# EAGLE board ring_mod_simple (EAGLE 5.10)
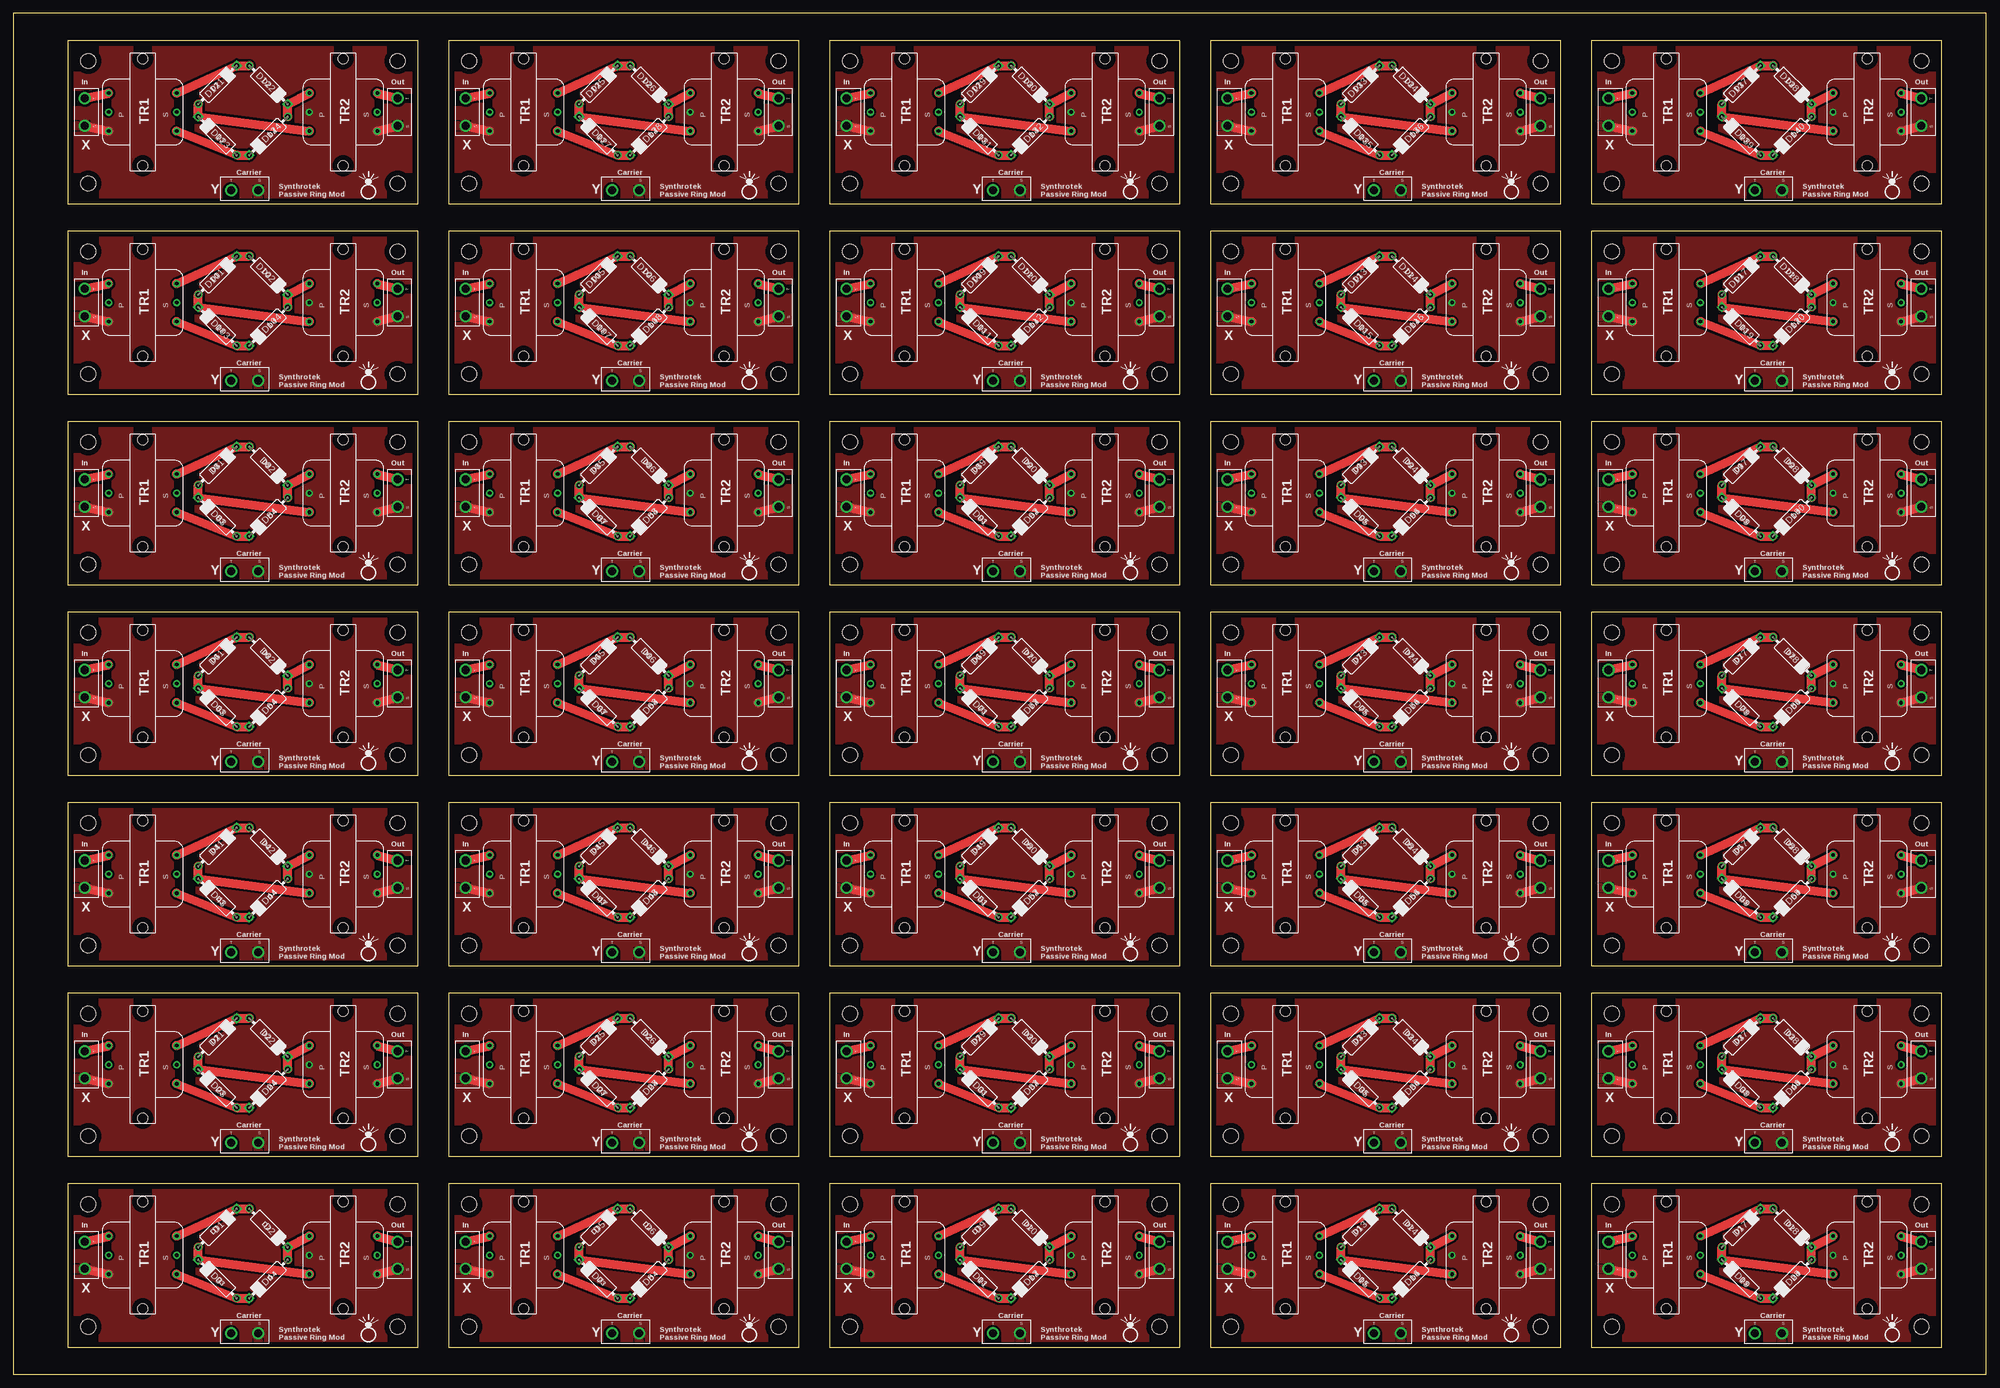
[diagram p0: board, top side]
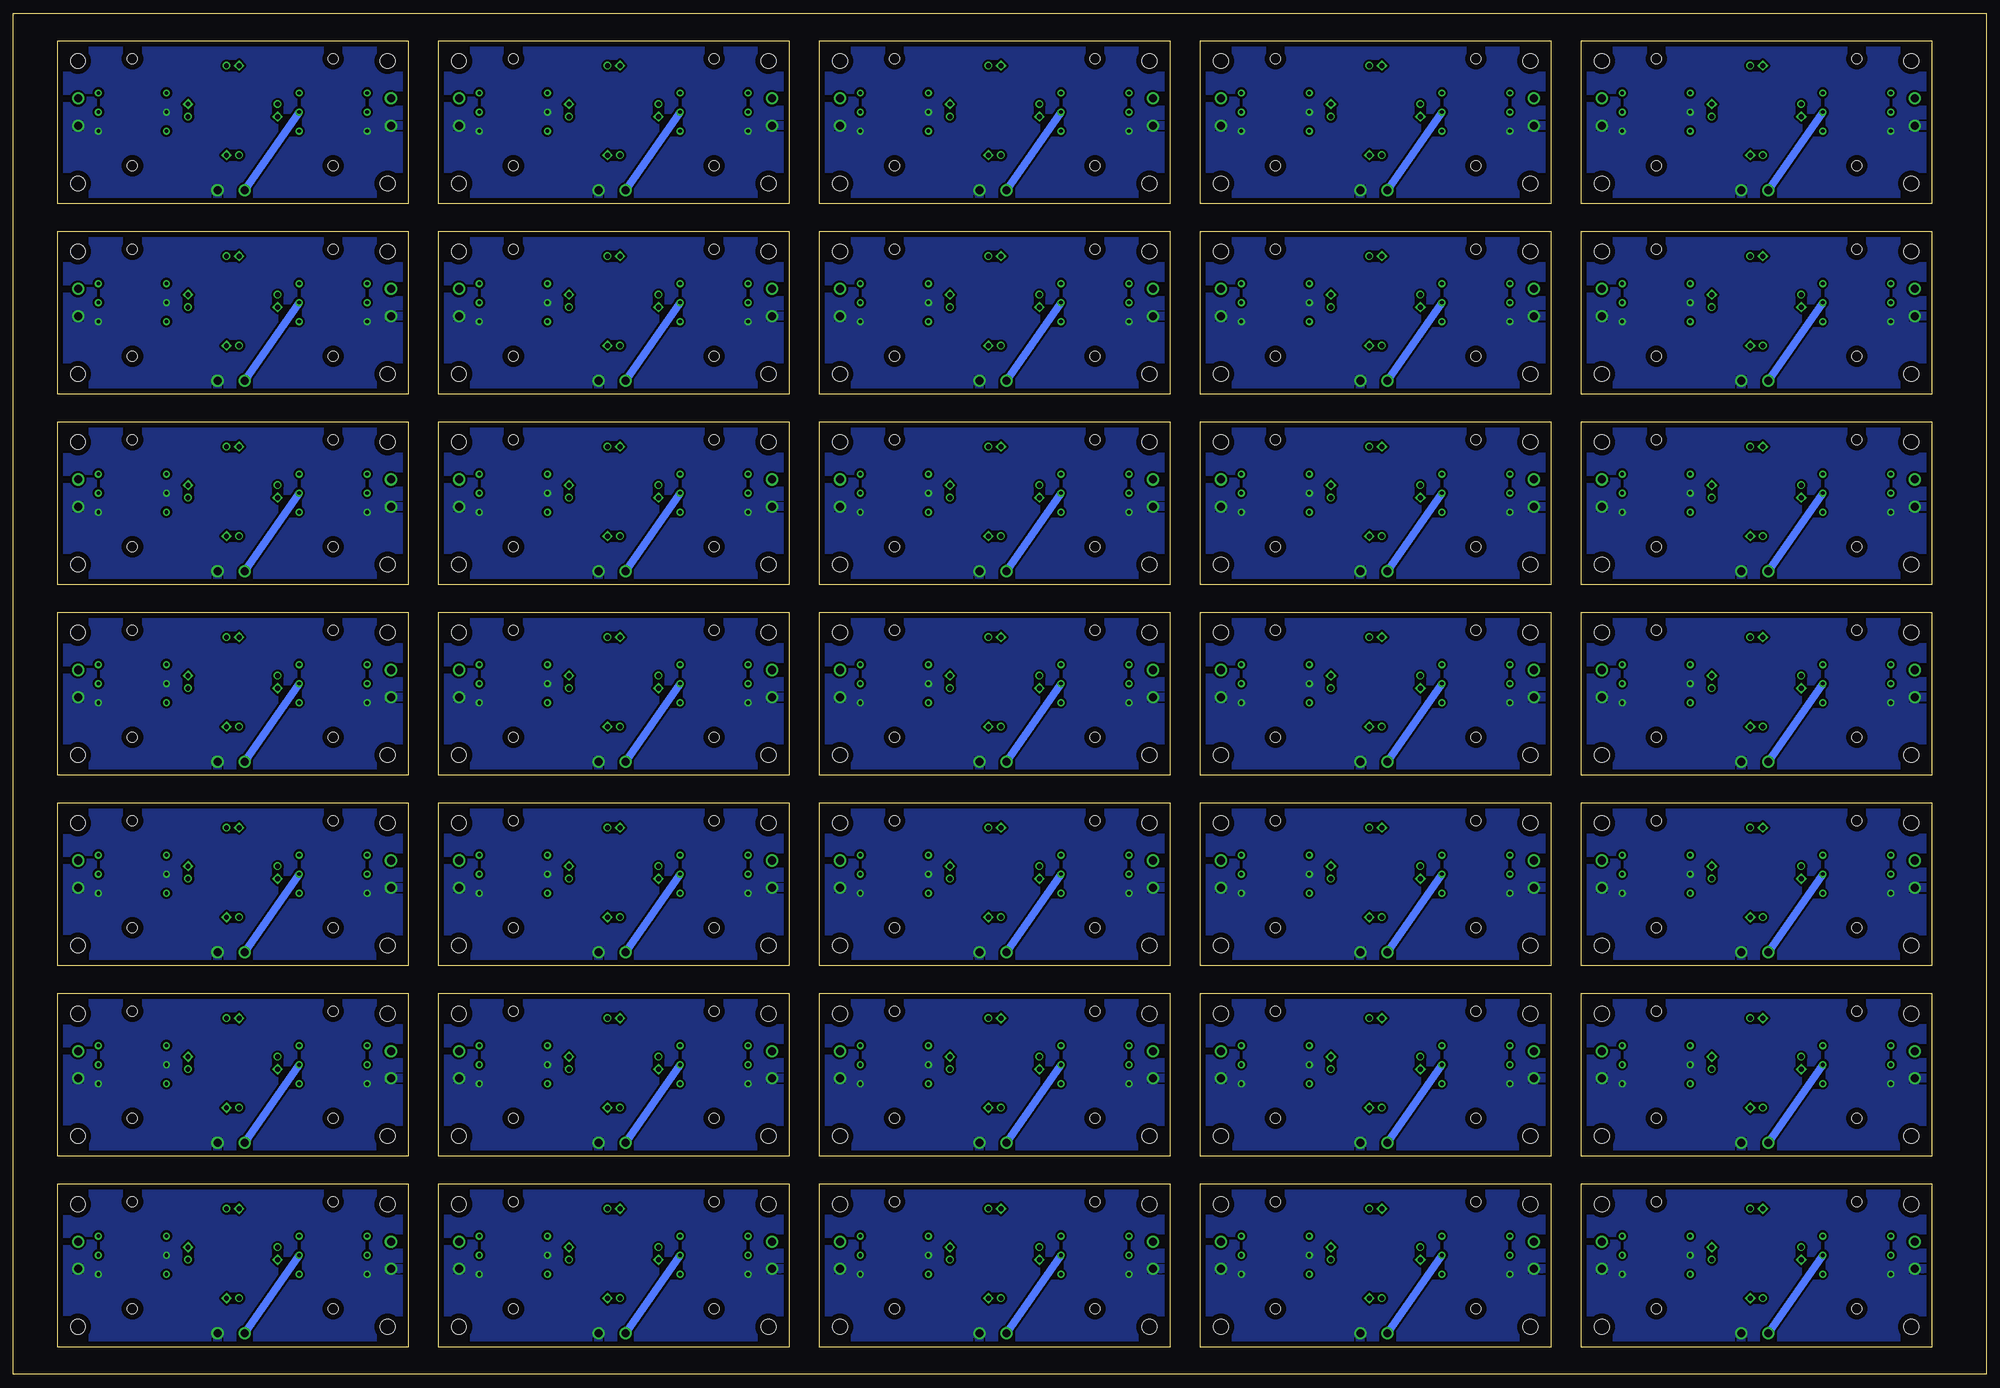
[diagram p1: board, bottom side, seen from below]

Size 368.3 x 254 mm. Coordinates in mm from the lower left corner, seen from the top.
Outline: 10.16,5.08 75.56,5.08 75.56,35.56 10.16,35.56 10.16,5.08
Outline: 81.28,5.08 146.69,5.08 146.69,35.56 81.28,35.56 81.28,5.08
Outline: 152.4,5.08 217.81,5.08 217.81,35.56 152.4,35.56 152.4,5.08
Outline: 223.52,5.08 288.93,5.08 288.93,35.56 223.52,35.56 223.52,5.08
Outline: 294.64,5.08 360.05,5.08 360.05,35.56 294.64,35.56 294.64,5.08
Outline: 10.16,40.64 75.56,40.64 75.56,71.12 10.16,71.12 10.16,40.64
Outline: 81.28,40.64 146.69,40.64 146.69,71.12 81.28,71.12 81.28,40.64
Outline: 152.4,40.64 217.81,40.64 217.81,71.12 152.4,71.12 152.4,40.64
Outline: 223.52,40.64 288.93,40.64 288.93,71.12 223.52,71.12 223.52,40.64
Outline: 294.64,40.64 360.05,40.64 360.05,71.12 294.64,71.12 294.64,40.64
Outline: 10.16,76.2 75.56,76.2 75.56,106.68 10.16,106.68 10.16,76.2
Outline: 81.28,76.2 146.69,76.2 146.69,106.68 81.28,106.68 81.28,76.2
Outline: 152.4,76.2 217.81,76.2 217.81,106.68 152.4,106.68 152.4,76.2
Outline: 223.52,76.2 288.93,76.2 288.93,106.68 223.52,106.68 223.52,76.2
Outline: 294.64,76.2 360.05,76.2 360.05,106.68 294.64,106.68 294.64,76.2
Outline: 10.16,111.76 75.56,111.76 75.56,142.24 10.16,142.24 10.16,111.76
Outline: 81.28,111.76 146.69,111.76 146.69,142.24 81.28,142.24 81.28,111.76
Outline: 152.4,111.76 217.81,111.76 217.81,142.24 152.4,142.24 152.4,111.76
Outline: 223.52,111.76 288.93,111.76 288.93,142.24 223.52,142.24 223.52,111.76
Outline: 294.64,111.76 360.05,111.76 360.05,142.24 294.64,142.24 294.64,111.76
Outline: 10.16,147.32 75.56,147.32 75.56,177.8 10.16,177.8 10.16,147.32
Outline: 81.28,147.32 146.69,147.32 146.69,177.8 81.28,177.8 81.28,147.32
Outline: 152.4,147.32 217.81,147.32 217.81,177.8 152.4,177.8 152.4,147.32
Outline: 223.52,147.32 288.93,147.32 288.93,177.8 223.52,177.8 223.52,147.32
Outline: 294.64,147.32 360.05,147.32 360.05,177.8 294.64,177.8 294.64,147.32
Outline: 10.16,182.88 75.56,182.88 75.56,213.36 10.16,213.36 10.16,182.88
Outline: 81.28,182.88 146.69,182.88 146.69,213.36 81.28,213.36 81.28,182.88
Outline: 152.4,182.88 217.81,182.88 217.81,213.36 152.4,213.36 152.4,182.88
Outline: 223.52,182.88 288.93,182.88 288.93,213.36 223.52,213.36 223.52,182.88
Outline: 294.64,182.88 360.05,182.88 360.05,213.36 294.64,213.36 294.64,182.88
Outline: 10.16,218.44 75.56,218.44 75.56,248.92 10.16,248.92 10.16,218.44
Outline: 81.28,218.44 146.69,218.44 146.69,248.92 81.28,248.92 81.28,218.44
Outline: 152.4,218.44 217.81,218.44 217.81,248.92 152.4,248.92 152.4,218.44
Outline: 223.52,218.44 288.93,218.44 288.93,248.92 223.52,248.92 223.52,218.44
Outline: 294.64,218.44 360.05,218.44 360.05,248.92 294.64,248.92 294.64,218.44
Copper layers (1*16): Top 0.035mm / dielectric 1.5mm / Bottom 0.035mm
Design rules "default": minimum track width 10mil, minimum drill 24mil, track to track 8mil, track to pad 8mil, pad to pad 8mil, via to via 8mil, smd to smd 8mil, copper to edge 40mil, drill to drill 8mil, minimum pad ring 10mil, minimum via ring 8mil, stop-mask expansion 4mil, vias tented up to drill 0mil, thermal gap 10mil
Holes 2.8 mm at 13.97,31.75 13.97,8.89 71.76,8.89 71.76,31.75 85.09,31.75 85.09,8.89 142.88,8.89 142.88,31.75 156.21,31.75 156.21,8.89 214,8.89 214,31.75 227.33,31.75 227.33,8.89 285.12,8.89 285.12,31.75 298.45,31.75 298.45,8.89 356.24,8.89 356.24,31.75 13.97,67.31 13.97,44.45 71.76,44.45 71.76,67.31 85.09,67.31 85.09,44.45 142.88,44.45 142.88,67.31 156.21,67.31 156.21,44.45 214,44.45 214,67.31 227.33,67.31 227.33,44.45 285.12,44.45 285.12,67.31 298.45,67.31 298.45,44.45 356.24,44.45 356.24,67.31 13.97,102.87 13.97,80.01 71.76,80.01 71.76,102.87 85.09,102.87 85.09,80.01 142.88,80.01 142.88,102.87 156.21,102.87 156.21,80.01 214,80.01 214,102.87 227.33,102.87 227.33,80.01 285.12,80.01 285.12,102.87 298.45,102.87 298.45,80.01 356.24,80.01 356.24,102.87 13.97,138.43 13.97,115.57 71.76,115.57 71.76,138.43 85.09,138.43 85.09,115.57 142.88,115.57 142.88,138.43 156.21,138.43 156.21,115.57 214,115.57 214,138.43 227.33,138.43 227.33,115.57 285.12,115.57 285.12,138.43 298.45,138.43 298.45,115.57 356.24,115.57 356.24,138.43 13.97,173.99 13.97,151.13 71.76,151.13 71.76,173.99 85.09,173.99 85.09,151.13 142.88,151.13 142.88,173.99 156.21,173.99 156.21,151.13 214,151.13 214,173.99 227.33,173.99 227.33,151.13 285.12,151.13 285.12,173.99 298.45,173.99 298.45,151.13 356.24,151.13 356.24,173.99 13.97,209.55 13.97,186.69 71.76,186.69 71.76,209.55 85.09,209.55 85.09,186.69 142.88,186.69 142.88,209.55 156.21,209.55 156.21,186.69 214,186.69 214,209.55 227.33,209.55 227.33,186.69 285.12,186.69 285.12,209.55 298.45,209.55 298.45,186.69 356.24,186.69 356.24,209.55 13.97,245.11 13.97,222.25 71.76,222.25 71.76,245.11 85.09,245.11 85.09,222.25 142.88,222.25 142.88,245.11 156.21,245.11 156.21,222.25 214,222.25 214,245.11 227.33,245.11 227.33,222.25 285.12,222.25 285.12,245.11 298.45,245.11 298.45,222.25 356.24,222.25 356.24,245.11

## Footprints (pad centres in the part's own frame; a part is rotated, then mirrored left to right if it is on the bottom)
DO07 = drill 0.9 round: A 5.08,0 | drill 0.9 square: C -5.08,0
42TM = drill 0.7 pad 1.3 round: 1 -3.556,-6.35; 2 0,-6.35; 3 3.556,-6.35; 4 3.556,6.35; 5 0,6.35; 6 -3.556,6.35 | hole 1.9: -9.982,0; 9.982,0
MONO_JACK = drill 1.5 round: SLEEVE 2.54,0; TIP -2.54,0

## Placement (x,y rotation side)
D1  [DO07]  38.1,27.3 225 top
D2  [DO07]  47.62,27.3 135 top
D3  [DO07]  38.1,17.78 315 top
D4  [DO07]  47.62,17.78 45 top
D5  [DO07]  109.22,27.3 225 top
D6  [DO07]  118.75,27.3 135 top
D7  [DO07]  109.22,17.78 315 top
D8  [DO07]  118.75,17.78 45 top
D9  [DO07]  180.34,27.3 225 top
D10  [DO07]  189.87,27.3 135 top
D11  [DO07]  180.34,17.78 315 top
D12  [DO07]  189.87,17.78 45 top
D13  [DO07]  251.46,27.3 225 top
D14  [DO07]  260.99,27.3 135 top
D15  [DO07]  251.46,17.78 315 top
D16  [DO07]  260.99,17.78 45 top
D17  [DO07]  322.58,27.3 225 top
D18  [DO07]  332.11,27.3 135 top
D19  [DO07]  322.58,17.78 315 top
D20  [DO07]  332.11,17.78 45 top
D21  [DO07]  38.1,62.87 225 top
D22  [DO07]  47.62,62.87 135 top
D23  [DO07]  38.1,53.34 315 top
D24  [DO07]  47.62,53.34 45 top
D25  [DO07]  109.22,62.87 225 top
D26  [DO07]  118.75,62.87 135 top
D27  [DO07]  109.22,53.34 315 top
D28  [DO07]  118.75,53.34 45 top
D29  [DO07]  180.34,62.87 225 top
D30  [DO07]  189.87,62.87 135 top
D31  [DO07]  180.34,53.34 315 top
D32  [DO07]  189.87,53.34 45 top
D33  [DO07]  251.46,62.87 225 top
D34  [DO07]  260.99,62.87 135 top
D35  [DO07]  251.46,53.34 315 top
D36  [DO07]  260.99,53.34 45 top
D37  [DO07]  322.58,62.87 225 top
D38  [DO07]  332.11,62.87 135 top
D39  [DO07]  322.58,53.34 315 top
D40  [DO07]  332.11,53.34 45 top
D41  [DO07]  38.1,98.43 225 top
D42  [DO07]  47.62,98.43 135 top
D43  [DO07]  38.1,88.9 315 top
D44  [DO07]  47.62,88.9 45 top
D45  [DO07]  109.22,98.43 225 top
D46  [DO07]  118.75,98.43 135 top
D47  [DO07]  109.22,88.9 315 top
D48  [DO07]  118.75,88.9 45 top
D49  [DO07]  180.34,98.43 225 top
D50  [DO07]  189.87,98.43 135 top
D51  [DO07]  180.34,88.9 315 top
D52  [DO07]  189.87,88.9 45 top
D53  [DO07]  251.46,98.43 225 top
D54  [DO07]  260.99,98.43 135 top
D55  [DO07]  251.46,88.9 315 top
D56  [DO07]  260.99,88.9 45 top
D57  [DO07]  322.58,98.43 225 top
D58  [DO07]  332.11,98.43 135 top
D59  [DO07]  322.58,88.9 315 top
D60  [DO07]  332.11,88.9 45 top
D61  [DO07]  38.1,133.98 225 top
D62  [DO07]  47.62,133.98 135 top
D63  [DO07]  38.1,124.46 315 top
D64  [DO07]  47.62,124.46 45 top
D65  [DO07]  109.22,133.98 225 top
D66  [DO07]  118.75,133.98 135 top
D67  [DO07]  109.22,124.46 315 top
D68  [DO07]  118.75,124.46 45 top
D69  [DO07]  180.34,133.98 225 top
D70  [DO07]  189.87,133.98 135 top
D71  [DO07]  180.34,124.46 315 top
D72  [DO07]  189.87,124.46 45 top
D73  [DO07]  251.46,133.98 225 top
D74  [DO07]  260.99,133.98 135 top
D75  [DO07]  251.46,124.46 315 top
D76  [DO07]  260.99,124.46 45 top
D77  [DO07]  322.58,133.98 225 top
D78  [DO07]  332.11,133.98 135 top
D79  [DO07]  322.58,124.46 315 top
D80  [DO07]  332.11,124.46 45 top
D81  [DO07]  38.1,169.54 225 top
D82  [DO07]  47.62,169.54 135 top
D83  [DO07]  38.1,160.02 315 top
D84  [DO07]  47.62,160.02 45 top
D85  [DO07]  109.22,169.54 225 top
D86  [DO07]  118.75,169.54 135 top
D87  [DO07]  109.22,160.02 315 top
D88  [DO07]  118.75,160.02 45 top
D89  [DO07]  180.34,169.54 225 top
D90  [DO07]  189.87,169.54 135 top
D91  [DO07]  180.34,160.02 315 top
D92  [DO07]  189.87,160.02 45 top
D93  [DO07]  251.46,169.54 225 top
D94  [DO07]  260.99,169.54 135 top
D95  [DO07]  251.46,160.02 315 top
D96  [DO07]  260.99,160.02 45 top
D97  [DO07]  322.58,169.54 225 top
D98  [DO07]  332.11,169.54 135 top
D99  [DO07]  322.58,160.02 315 top
D100  [DO07]  332.11,160.02 45 top
D101  [DO07]  38.1,205.1 225 top
D102  [DO07]  47.62,205.1 135 top
D103  [DO07]  38.1,195.58 315 top
D104  [DO07]  47.62,195.58 45 top
D105  [DO07]  109.22,205.1 225 top
D106  [DO07]  118.75,205.1 135 top
D107  [DO07]  109.22,195.58 315 top
D108  [DO07]  118.75,195.58 45 top
D109  [DO07]  180.34,205.1 225 top
D110  [DO07]  189.87,205.1 135 top
D111  [DO07]  180.34,195.58 315 top
D112  [DO07]  189.87,195.58 45 top
D113  [DO07]  251.46,205.1 225 top
D114  [DO07]  260.99,205.1 135 top
D115  [DO07]  251.46,195.58 315 top
D116  [DO07]  260.99,195.58 45 top
D117  [DO07]  322.58,205.1 225 top
D118  [DO07]  332.11,205.1 135 top
D119  [DO07]  322.58,195.58 315 top
D120  [DO07]  332.11,195.58 45 top
D121  [DO07]  38.1,240.66 225 top
D122  [DO07]  47.62,240.66 135 top
D123  [DO07]  38.1,231.14 315 top
D124  [DO07]  47.62,231.14 45 top
D125  [DO07]  109.22,240.66 225 top
D126  [DO07]  118.75,240.66 135 top
D127  [DO07]  109.22,231.14 315 top
D128  [DO07]  118.75,231.14 45 top
D129  [DO07]  180.34,240.66 225 top
D130  [DO07]  189.87,240.66 135 top
D131  [DO07]  180.34,231.14 315 top
D132  [DO07]  189.87,231.14 45 top
D133  [DO07]  251.46,240.66 225 top
D134  [DO07]  260.99,240.66 135 top
D135  [DO07]  251.46,231.14 315 top
D136  [DO07]  260.99,231.14 45 top
D137  [DO07]  322.58,240.66 225 top
D138  [DO07]  332.11,240.66 135 top
D139  [DO07]  322.58,231.14 315 top
D140  [DO07]  332.11,231.14 45 top
TR1  42TM018  [42TM]  24.13,22.22 270 top
TR2  42TM018  [42TM]  61.59,22.22 270 top
TR3  42TM018  [42TM]  95.25,22.22 270 top
TR4  42TM018  [42TM]  132.72,22.22 270 top
TR5  42TM018  [42TM]  166.37,22.22 270 top
TR6  42TM018  [42TM]  203.84,22.22 270 top
TR7  42TM018  [42TM]  237.49,22.22 270 top
TR8  42TM018  [42TM]  274.95,22.22 270 top
TR9  42TM018  [42TM]  308.61,22.22 270 top
TR10  42TM018  [42TM]  346.07,22.22 270 top
TR11  42TM018  [42TM]  24.13,57.78 270 top
TR12  42TM018  [42TM]  61.59,57.78 270 top
TR13  42TM018  [42TM]  95.25,57.78 270 top
TR14  42TM018  [42TM]  132.72,57.78 270 top
TR15  42TM018  [42TM]  166.37,57.78 270 top
TR16  42TM018  [42TM]  203.84,57.78 270 top
TR17  42TM018  [42TM]  237.49,57.78 270 top
TR18  42TM018  [42TM]  274.95,57.78 270 top
TR19  42TM018  [42TM]  308.61,57.78 270 top
TR20  42TM018  [42TM]  346.07,57.78 270 top
TR21  42TM018  [42TM]  24.13,93.35 270 top
TR22  42TM018  [42TM]  61.59,93.35 270 top
TR23  42TM018  [42TM]  95.25,93.35 270 top
TR24  42TM018  [42TM]  132.72,93.35 270 top
TR25  42TM018  [42TM]  166.37,93.35 270 top
TR26  42TM018  [42TM]  203.84,93.35 270 top
TR27  42TM018  [42TM]  237.49,93.35 270 top
TR28  42TM018  [42TM]  274.95,93.35 270 top
TR29  42TM018  [42TM]  308.61,93.35 270 top
TR30  42TM018  [42TM]  346.07,93.35 270 top
TR31  42TM018  [42TM]  24.13,128.91 270 top
TR32  42TM018  [42TM]  61.59,128.91 270 top
TR33  42TM018  [42TM]  95.25,128.91 270 top
TR34  42TM018  [42TM]  132.72,128.91 270 top
TR35  42TM018  [42TM]  166.37,128.91 270 top
TR36  42TM018  [42TM]  203.84,128.91 270 top
TR37  42TM018  [42TM]  237.49,128.91 270 top
TR38  42TM018  [42TM]  274.95,128.91 270 top
TR39  42TM018  [42TM]  308.61,128.91 270 top
TR40  42TM018  [42TM]  346.07,128.91 270 top
TR41  42TM018  [42TM]  24.13,164.47 270 top
TR42  42TM018  [42TM]  61.59,164.47 270 top
TR43  42TM018  [42TM]  95.25,164.47 270 top
TR44  42TM018  [42TM]  132.72,164.47 270 top
TR45  42TM018  [42TM]  166.37,164.47 270 top
TR46  42TM018  [42TM]  203.84,164.47 270 top
TR47  42TM018  [42TM]  237.49,164.47 270 top
TR48  42TM018  [42TM]  274.95,164.47 270 top
TR49  42TM018  [42TM]  308.61,164.47 270 top
TR50  42TM018  [42TM]  346.07,164.47 270 top
TR51  42TM018  [42TM]  24.13,200.03 270 top
TR52  42TM018  [42TM]  61.59,200.03 270 top
TR53  42TM018  [42TM]  95.25,200.03 270 top
TR54  42TM018  [42TM]  132.72,200.03 270 top
TR55  42TM018  [42TM]  166.37,200.03 270 top
TR56  42TM018  [42TM]  203.84,200.03 270 top
TR57  42TM018  [42TM]  237.49,200.03 270 top
TR58  42TM018  [42TM]  274.95,200.03 270 top
TR59  42TM018  [42TM]  308.61,200.03 270 top
TR60  42TM018  [42TM]  346.07,200.03 270 top
TR61  42TM018  [42TM]  24.13,235.58 270 top
TR62  42TM018  [42TM]  61.59,235.58 270 top
TR63  42TM018  [42TM]  95.25,235.58 270 top
TR64  42TM018  [42TM]  132.72,235.58 270 top
TR65  42TM018  [42TM]  166.37,235.58 270 top
TR66  42TM018  [42TM]  203.84,235.58 270 top
TR67  42TM018  [42TM]  237.49,235.58 270 top
TR68  42TM018  [42TM]  274.95,235.58 270 top
TR69  42TM018  [42TM]  308.61,235.58 270 top
TR70  42TM018  [42TM]  346.07,235.58 270 top
U$1  MONO_JACK  [MONO_JACK]  71.76,22.22 270 top
U$2  MONO_JACK  [MONO_JACK]  13.34,22.22 270 top
U$3  MONO_JACK  [MONO_JACK]  43.18,7.62 0 top
U$4  MONO_JACK  [MONO_JACK]  142.88,22.22 270 top
U$5  MONO_JACK  [MONO_JACK]  84.45,22.22 270 top
U$6  MONO_JACK  [MONO_JACK]  114.3,7.62 0 top
U$7  MONO_JACK  [MONO_JACK]  214,22.22 270 top
U$8  MONO_JACK  [MONO_JACK]  155.58,22.22 270 top
U$9  MONO_JACK  [MONO_JACK]  185.42,7.62 0 top
U$10  MONO_JACK  [MONO_JACK]  285.12,22.22 270 top
U$11  MONO_JACK  [MONO_JACK]  226.69,22.22 270 top
U$12  MONO_JACK  [MONO_JACK]  256.54,7.62 0 top
U$13  MONO_JACK  [MONO_JACK]  356.24,22.22 270 top
U$14  MONO_JACK  [MONO_JACK]  297.81,22.22 270 top
U$15  MONO_JACK  [MONO_JACK]  327.66,7.62 0 top
U$16  MONO_JACK  [MONO_JACK]  71.76,57.78 270 top
U$17  MONO_JACK  [MONO_JACK]  13.34,57.78 270 top
U$18  MONO_JACK  [MONO_JACK]  43.18,43.18 0 top
U$19  MONO_JACK  [MONO_JACK]  142.88,57.78 270 top
U$20  MONO_JACK  [MONO_JACK]  84.45,57.78 270 top
U$21  MONO_JACK  [MONO_JACK]  114.3,43.18 0 top
U$22  MONO_JACK  [MONO_JACK]  214,57.78 270 top
U$23  MONO_JACK  [MONO_JACK]  155.58,57.78 270 top
U$24  MONO_JACK  [MONO_JACK]  185.42,43.18 0 top
U$25  MONO_JACK  [MONO_JACK]  285.12,57.78 270 top
U$26  MONO_JACK  [MONO_JACK]  226.69,57.78 270 top
U$27  MONO_JACK  [MONO_JACK]  256.54,43.18 0 top
U$28  MONO_JACK  [MONO_JACK]  356.24,57.78 270 top
U$29  MONO_JACK  [MONO_JACK]  297.81,57.78 270 top
U$30  MONO_JACK  [MONO_JACK]  327.66,43.18 0 top
U$31  MONO_JACK  [MONO_JACK]  71.76,93.35 270 top
U$32  MONO_JACK  [MONO_JACK]  13.34,93.35 270 top
U$33  MONO_JACK  [MONO_JACK]  43.18,78.74 0 top
U$34  MONO_JACK  [MONO_JACK]  142.88,93.35 270 top
U$35  MONO_JACK  [MONO_JACK]  84.45,93.35 270 top
U$36  MONO_JACK  [MONO_JACK]  114.3,78.74 0 top
U$37  MONO_JACK  [MONO_JACK]  214,93.35 270 top
U$38  MONO_JACK  [MONO_JACK]  155.58,93.35 270 top
U$39  MONO_JACK  [MONO_JACK]  185.42,78.74 0 top
U$40  MONO_JACK  [MONO_JACK]  285.12,93.35 270 top
U$41  MONO_JACK  [MONO_JACK]  226.69,93.35 270 top
U$42  MONO_JACK  [MONO_JACK]  256.54,78.74 0 top
U$43  MONO_JACK  [MONO_JACK]  356.24,93.35 270 top
U$44  MONO_JACK  [MONO_JACK]  297.81,93.35 270 top
U$45  MONO_JACK  [MONO_JACK]  327.66,78.74 0 top
U$46  MONO_JACK  [MONO_JACK]  71.76,128.91 270 top
U$47  MONO_JACK  [MONO_JACK]  13.34,128.91 270 top
U$48  MONO_JACK  [MONO_JACK]  43.18,114.3 0 top
U$49  MONO_JACK  [MONO_JACK]  142.88,128.91 270 top
U$50  MONO_JACK  [MONO_JACK]  84.45,128.91 270 top
U$51  MONO_JACK  [MONO_JACK]  114.3,114.3 0 top
U$52  MONO_JACK  [MONO_JACK]  214,128.91 270 top
U$53  MONO_JACK  [MONO_JACK]  155.58,128.91 270 top
U$54  MONO_JACK  [MONO_JACK]  185.42,114.3 0 top
U$55  MONO_JACK  [MONO_JACK]  285.12,128.91 270 top
U$56  MONO_JACK  [MONO_JACK]  226.69,128.91 270 top
U$57  MONO_JACK  [MONO_JACK]  256.54,114.3 0 top
U$58  MONO_JACK  [MONO_JACK]  356.24,128.91 270 top
U$59  MONO_JACK  [MONO_JACK]  297.81,128.91 270 top
U$60  MONO_JACK  [MONO_JACK]  327.66,114.3 0 top
U$61  MONO_JACK  [MONO_JACK]  71.76,164.47 270 top
U$62  MONO_JACK  [MONO_JACK]  13.34,164.47 270 top
U$63  MONO_JACK  [MONO_JACK]  43.18,149.86 0 top
U$64  MONO_JACK  [MONO_JACK]  142.88,164.47 270 top
U$65  MONO_JACK  [MONO_JACK]  84.45,164.47 270 top
U$66  MONO_JACK  [MONO_JACK]  114.3,149.86 0 top
U$67  MONO_JACK  [MONO_JACK]  214,164.47 270 top
U$68  MONO_JACK  [MONO_JACK]  155.58,164.47 270 top
U$69  MONO_JACK  [MONO_JACK]  185.42,149.86 0 top
U$70  MONO_JACK  [MONO_JACK]  285.12,164.47 270 top
U$71  MONO_JACK  [MONO_JACK]  226.69,164.47 270 top
U$72  MONO_JACK  [MONO_JACK]  256.54,149.86 0 top
U$73  MONO_JACK  [MONO_JACK]  356.24,164.47 270 top
U$74  MONO_JACK  [MONO_JACK]  297.81,164.47 270 top
U$75  MONO_JACK  [MONO_JACK]  327.66,149.86 0 top
U$76  MONO_JACK  [MONO_JACK]  71.76,200.03 270 top
U$77  MONO_JACK  [MONO_JACK]  13.34,200.03 270 top
U$78  MONO_JACK  [MONO_JACK]  43.18,185.42 0 top
U$79  MONO_JACK  [MONO_JACK]  142.88,200.03 270 top
U$80  MONO_JACK  [MONO_JACK]  84.45,200.03 270 top
U$81  MONO_JACK  [MONO_JACK]  114.3,185.42 0 top
U$82  MONO_JACK  [MONO_JACK]  214,200.03 270 top
U$83  MONO_JACK  [MONO_JACK]  155.58,200.03 270 top
U$84  MONO_JACK  [MONO_JACK]  185.42,185.42 0 top
U$85  MONO_JACK  [MONO_JACK]  285.12,200.03 270 top
U$86  MONO_JACK  [MONO_JACK]  226.69,200.03 270 top
U$87  MONO_JACK  [MONO_JACK]  256.54,185.42 0 top
U$88  MONO_JACK  [MONO_JACK]  356.24,200.03 270 top
U$89  MONO_JACK  [MONO_JACK]  297.81,200.03 270 top
U$90  MONO_JACK  [MONO_JACK]  327.66,185.42 0 top
U$91  MONO_JACK  [MONO_JACK]  71.76,235.58 270 top
U$92  MONO_JACK  [MONO_JACK]  13.34,235.58 270 top
U$93  MONO_JACK  [MONO_JACK]  43.18,220.98 0 top
U$94  MONO_JACK  [MONO_JACK]  142.88,235.58 270 top
U$95  MONO_JACK  [MONO_JACK]  84.45,235.58 270 top
U$96  MONO_JACK  [MONO_JACK]  114.3,220.98 0 top
U$97  MONO_JACK  [MONO_JACK]  214,235.58 270 top
U$98  MONO_JACK  [MONO_JACK]  155.58,235.58 270 top
U$99  MONO_JACK  [MONO_JACK]  185.42,220.98 0 top
U$100  MONO_JACK  [MONO_JACK]  285.12,235.58 270 top
U$101  MONO_JACK  [MONO_JACK]  226.69,235.58 270 top
U$102  MONO_JACK  [MONO_JACK]  256.54,220.98 0 top
U$103  MONO_JACK  [MONO_JACK]  356.24,235.58 270 top
U$104  MONO_JACK  [MONO_JACK]  297.81,235.58 270 top
U$105  MONO_JACK  [MONO_JACK]  327.66,220.98 0 top

## Library data of the parts
D1-D140 = gm-diodes
TR1-TR70 = trafo-xicon
U$1-U$105 = 00_steve

## Nets
GND: TR1.3 TR2.2 TR2.4 U$1.SLEEVE U$2.SLEEVE U$3.SLEEVE
GND1: TR3.3 TR4.2 TR4.4 U$4.SLEEVE U$5.SLEEVE U$6.SLEEVE
GND2: TR5.3 TR6.2 TR6.4 U$7.SLEEVE U$8.SLEEVE U$9.SLEEVE
GND3: TR7.3 TR8.2 TR8.4 U$10.SLEEVE U$11.SLEEVE U$12.SLEEVE
GND4: TR9.3 TR10.2 TR10.4 U$13.SLEEVE U$14.SLEEVE U$15.SLEEVE
GND5: TR11.3 TR12.2 TR12.4 U$16.SLEEVE U$17.SLEEVE U$18.SLEEVE
GND6: TR13.3 TR14.2 TR14.4 U$19.SLEEVE U$20.SLEEVE U$21.SLEEVE
GND7: TR15.3 TR16.2 TR16.4 U$22.SLEEVE U$23.SLEEVE U$24.SLEEVE
GND8: TR17.3 TR18.2 TR18.4 U$25.SLEEVE U$26.SLEEVE U$27.SLEEVE
GND9: TR19.3 TR20.2 TR20.4 U$28.SLEEVE U$29.SLEEVE U$30.SLEEVE
GND10: TR21.3 TR22.2 TR22.4 U$31.SLEEVE U$32.SLEEVE U$33.SLEEVE
GND11: TR23.3 TR24.2 TR24.4 U$34.SLEEVE U$35.SLEEVE U$36.SLEEVE
GND12: TR25.3 TR26.2 TR26.4 U$37.SLEEVE U$38.SLEEVE U$39.SLEEVE
GND13: TR27.3 TR28.2 TR28.4 U$40.SLEEVE U$41.SLEEVE U$42.SLEEVE
GND14: TR29.3 TR30.2 TR30.4 U$43.SLEEVE U$44.SLEEVE U$45.SLEEVE
GND15: TR31.3 TR32.2 TR32.4 U$46.SLEEVE U$47.SLEEVE U$48.SLEEVE
GND16: TR33.3 TR34.2 TR34.4 U$49.SLEEVE U$50.SLEEVE U$51.SLEEVE
GND17: TR35.3 TR36.2 TR36.4 U$52.SLEEVE U$53.SLEEVE U$54.SLEEVE
GND18: TR37.3 TR38.2 TR38.4 U$55.SLEEVE U$56.SLEEVE U$57.SLEEVE
GND19: TR39.3 TR40.2 TR40.4 U$58.SLEEVE U$59.SLEEVE U$60.SLEEVE
GND20: TR41.3 TR42.2 TR42.4 U$61.SLEEVE U$62.SLEEVE U$63.SLEEVE
GND21: TR43.3 TR44.2 TR44.4 U$64.SLEEVE U$65.SLEEVE U$66.SLEEVE
GND22: TR45.3 TR46.2 TR46.4 U$67.SLEEVE U$68.SLEEVE U$69.SLEEVE
GND23: TR47.3 TR48.2 TR48.4 U$70.SLEEVE U$71.SLEEVE U$72.SLEEVE
GND24: TR49.3 TR50.2 TR50.4 U$73.SLEEVE U$74.SLEEVE U$75.SLEEVE
GND25: TR51.3 TR52.2 TR52.4 U$76.SLEEVE U$77.SLEEVE U$78.SLEEVE
GND26: TR53.3 TR54.2 TR54.4 U$79.SLEEVE U$80.SLEEVE U$81.SLEEVE
GND27: TR55.3 TR56.2 TR56.4 U$82.SLEEVE U$83.SLEEVE U$84.SLEEVE
GND28: TR57.3 TR58.2 TR58.4 U$85.SLEEVE U$86.SLEEVE U$87.SLEEVE
GND29: TR59.3 TR60.2 TR60.4 U$88.SLEEVE U$89.SLEEVE U$90.SLEEVE
GND30: TR61.3 TR62.2 TR62.4 U$91.SLEEVE U$92.SLEEVE U$93.SLEEVE
GND31: TR63.3 TR64.2 TR64.4 U$94.SLEEVE U$95.SLEEVE U$96.SLEEVE
GND32: TR65.3 TR66.2 TR66.4 U$97.SLEEVE U$98.SLEEVE U$99.SLEEVE
GND33: TR67.3 TR68.2 TR68.4 U$100.SLEEVE U$101.SLEEVE U$102.SLEEVE
GND34: TR69.3 TR70.2 TR70.4 U$103.SLEEVE U$104.SLEEVE U$105.SLEEVE
N$1: D1.C D2.A TR1.6
N$2: D2.C D4.A TR2.1
N$3: D3.A D4.C TR1.4
N$4: D1.A D3.C TR2.3
N$5: TR1.1 U$2.TIP
N$6: D5.C D6.A TR3.6
N$7: TR2.6 U$1.TIP
N$8: D6.C D8.A TR4.1
N$9: TR1.5 U$3.TIP
N$10: D7.A D8.C TR3.4
N$11: D5.A D7.C TR4.3
N$12: TR3.1 U$5.TIP
N$13: TR4.6 U$4.TIP
N$14: TR3.5 U$6.TIP
N$15: D9.C D10.A TR5.6
N$16: D10.C D12.A TR6.1
N$17: D11.A D12.C TR5.4
N$18: D9.A D11.C TR6.3
N$19: TR5.1 U$8.TIP
N$20: TR6.6 U$7.TIP
N$21: TR5.5 U$9.TIP
N$22: D13.C D14.A TR7.6
N$23: D14.C D16.A TR8.1
N$24: D15.A D16.C TR7.4
N$25: D13.A D15.C TR8.3
N$26: TR7.1 U$11.TIP
N$27: TR8.6 U$10.TIP
N$28: TR7.5 U$12.TIP
N$29: D17.C D18.A TR9.6
N$30: D18.C D20.A TR10.1
N$31: D19.A D20.C TR9.4
N$32: D17.A D19.C TR10.3
N$33: TR9.1 U$14.TIP
N$34: TR10.6 U$13.TIP
N$35: TR9.5 U$15.TIP
N$36: D21.C D22.A TR11.6
N$37: D22.C D24.A TR12.1
N$38: D23.A D24.C TR11.4
N$39: D21.A D23.C TR12.3
N$40: TR11.1 U$17.TIP
N$41: TR12.6 U$16.TIP
N$42: TR11.5 U$18.TIP
N$43: D25.C D26.A TR13.6
N$44: D26.C D28.A TR14.1
N$45: D27.A D28.C TR13.4
N$46: D25.A D27.C TR14.3
N$47: TR13.1 U$20.TIP
N$48: TR14.6 U$19.TIP
N$49: TR13.5 U$21.TIP
N$50: D29.C D30.A TR15.6
N$51: D30.C D32.A TR16.1
N$52: D31.A D32.C TR15.4
N$53: D29.A D31.C TR16.3
N$54: TR15.1 U$23.TIP
N$55: TR16.6 U$22.TIP
N$56: TR15.5 U$24.TIP
N$57: D33.C D34.A TR17.6
N$58: D34.C D36.A TR18.1
N$59: D35.A D36.C TR17.4
N$60: D33.A D35.C TR18.3
N$61: TR17.1 U$26.TIP
N$62: TR18.6 U$25.TIP
N$63: TR17.5 U$27.TIP
N$64: D37.C D38.A TR19.6
N$65: D38.C D40.A TR20.1
N$66: D39.A D40.C TR19.4
N$67: D37.A D39.C TR20.3
N$68: TR19.1 U$29.TIP
N$69: TR20.6 U$28.TIP
N$70: TR19.5 U$30.TIP
N$71: D41.C D42.A TR21.6
N$72: D42.C D44.A TR22.1
N$73: D43.A D44.C TR21.4
N$74: D41.A D43.C TR22.3
N$75: TR21.1 U$32.TIP
N$76: TR22.6 U$31.TIP
N$77: TR21.5 U$33.TIP
N$78: D45.C D46.A TR23.6
N$79: D46.C D48.A TR24.1
N$80: D47.A D48.C TR23.4
N$81: D45.A D47.C TR24.3
N$82: TR23.1 U$35.TIP
N$83: TR24.6 U$34.TIP
N$84: TR23.5 U$36.TIP
N$85: D49.C D50.A TR25.6
N$86: D50.C D52.A TR26.1
N$87: D51.A D52.C TR25.4
N$88: D49.A D51.C TR26.3
N$89: TR25.1 U$38.TIP
N$90: TR26.6 U$37.TIP
N$91: TR25.5 U$39.TIP
N$92: D53.C D54.A TR27.6
N$93: D54.C D56.A TR28.1
N$94: D55.A D56.C TR27.4
N$95: D53.A D55.C TR28.3
N$96: TR27.1 U$41.TIP
N$97: TR28.6 U$40.TIP
N$98: TR27.5 U$42.TIP
N$99: D57.C D58.A TR29.6
N$100: D58.C D60.A TR30.1
N$101: D59.A D60.C TR29.4
N$102: D57.A D59.C TR30.3
N$103: TR29.1 U$44.TIP
N$104: TR30.6 U$43.TIP
N$105: TR29.5 U$45.TIP
N$106: D61.C D62.A TR31.6
N$107: D62.C D64.A TR32.1
N$108: D63.A D64.C TR31.4
N$109: D61.A D63.C TR32.3
N$110: TR31.1 U$47.TIP
N$111: TR32.6 U$46.TIP
N$112: TR31.5 U$48.TIP
N$113: D65.C D66.A TR33.6
N$114: D66.C D68.A TR34.1
N$115: D67.A D68.C TR33.4
N$116: D65.A D67.C TR34.3
N$117: TR33.1 U$50.TIP
N$118: TR34.6 U$49.TIP
N$119: TR33.5 U$51.TIP
N$120: D69.C D70.A TR35.6
N$121: D70.C D72.A TR36.1
N$122: D71.A D72.C TR35.4
N$123: D69.A D71.C TR36.3
N$124: TR35.1 U$53.TIP
N$125: TR36.6 U$52.TIP
N$126: TR35.5 U$54.TIP
N$127: D73.C D74.A TR37.6
N$128: D74.C D76.A TR38.1
N$129: D75.A D76.C TR37.4
N$130: D73.A D75.C TR38.3
N$131: TR37.1 U$56.TIP
N$132: TR38.6 U$55.TIP
N$133: TR37.5 U$57.TIP
N$134: D77.C D78.A TR39.6
N$135: D78.C D80.A TR40.1
N$136: D79.A D80.C TR39.4
N$137: D77.A D79.C TR40.3
N$138: TR39.1 U$59.TIP
N$139: TR40.6 U$58.TIP
N$140: TR39.5 U$60.TIP
N$141: D81.C D82.A TR41.6
N$142: D82.C D84.A TR42.1
N$143: D83.A D84.C TR41.4
N$144: D81.A D83.C TR42.3
N$145: TR41.1 U$62.TIP
N$146: TR42.6 U$61.TIP
N$147: TR41.5 U$63.TIP
N$148: D85.C D86.A TR43.6
N$149: D86.C D88.A TR44.1
N$150: D87.A D88.C TR43.4
N$151: D85.A D87.C TR44.3
N$152: TR43.1 U$65.TIP
N$153: TR44.6 U$64.TIP
N$154: TR43.5 U$66.TIP
N$155: D89.C D90.A TR45.6
N$156: D90.C D92.A TR46.1
N$157: D91.A D92.C TR45.4
N$158: D89.A D91.C TR46.3
N$159: TR45.1 U$68.TIP
N$160: TR46.6 U$67.TIP
N$161: TR45.5 U$69.TIP
N$162: D93.C D94.A TR47.6
N$163: D94.C D96.A TR48.1
N$164: D95.A D96.C TR47.4
N$165: D93.A D95.C TR48.3
N$166: TR47.1 U$71.TIP
N$167: TR48.6 U$70.TIP
N$168: TR47.5 U$72.TIP
N$169: D97.C D98.A TR49.6
N$170: D98.C D100.A TR50.1
N$171: D99.A D100.C TR49.4
N$172: D97.A D99.C TR50.3
N$173: TR49.1 U$74.TIP
N$174: TR50.6 U$73.TIP
N$175: TR49.5 U$75.TIP
N$176: D101.C D102.A TR51.6
N$177: D102.C D104.A TR52.1
N$178: D103.A D104.C TR51.4
N$179: D101.A D103.C TR52.3
N$180: TR51.1 U$77.TIP
N$181: TR52.6 U$76.TIP
N$182: TR51.5 U$78.TIP
N$183: D105.C D106.A TR53.6
N$184: D106.C D108.A TR54.1
N$185: D107.A D108.C TR53.4
N$186: D105.A D107.C TR54.3
N$187: TR53.1 U$80.TIP
N$188: TR54.6 U$79.TIP
N$189: TR53.5 U$81.TIP
N$190: D109.C D110.A TR55.6
N$191: D110.C D112.A TR56.1
N$192: D111.A D112.C TR55.4
N$193: D109.A D111.C TR56.3
N$194: TR55.1 U$83.TIP
N$195: TR56.6 U$82.TIP
N$196: TR55.5 U$84.TIP
N$197: D113.C D114.A TR57.6
N$198: D114.C D116.A TR58.1
N$199: D115.A D116.C TR57.4
N$200: D113.A D115.C TR58.3
N$201: TR57.1 U$86.TIP
N$202: TR58.6 U$85.TIP
N$203: TR57.5 U$87.TIP
N$204: D117.C D118.A TR59.6
N$205: D118.C D120.A TR60.1
N$206: D119.A D120.C TR59.4
N$207: D117.A D119.C TR60.3
N$208: TR59.1 U$89.TIP
N$209: TR60.6 U$88.TIP
N$210: TR59.5 U$90.TIP
N$211: D121.C D122.A TR61.6
N$212: D122.C D124.A TR62.1
N$213: D123.A D124.C TR61.4
N$214: D121.A D123.C TR62.3
N$215: TR61.1 U$92.TIP
N$216: TR62.6 U$91.TIP
N$217: TR61.5 U$93.TIP
N$218: D125.C D126.A TR63.6
N$219: D126.C D128.A TR64.1
N$220: D127.A D128.C TR63.4
N$221: D125.A D127.C TR64.3
N$222: TR63.1 U$95.TIP
N$223: TR64.6 U$94.TIP
N$224: TR63.5 U$96.TIP
N$225: D129.C D130.A TR65.6
N$226: D130.C D132.A TR66.1
N$227: D131.A D132.C TR65.4
N$228: D129.A D131.C TR66.3
N$229: TR65.1 U$98.TIP
N$230: TR66.6 U$97.TIP
N$231: TR65.5 U$99.TIP
N$232: D133.C D134.A TR67.6
N$233: D134.C D136.A TR68.1
N$234: D135.A D136.C TR67.4
N$235: D133.A D135.C TR68.3
N$236: TR67.1 U$101.TIP
N$237: TR68.6 U$100.TIP
N$238: TR67.5 U$102.TIP
N$239: D137.C D138.A TR69.6
N$240: D138.C D140.A TR70.1
N$241: D139.A D140.C TR69.4
N$242: D137.A D139.C TR70.3
N$243: TR69.1 U$104.TIP
N$244: TR70.6 U$103.TIP
N$245: TR69.5 U$105.TIP

## Tracks (layer width: path | path; a pad name or v marks a point on that pad's centre or on a via)
GND
  Top 1.676: U$2.SLEEVE TR1.3 | TR2.4 U$1.SLEEVE
  pour Bottom (isolate 0.406): 10.16,35.56 75.56,35.56 75.56,5.08 10.16,5.08
  pour Top (isolate 0.406): 10.16,35.56 75.56,35.56 75.56,5.08 10.16,5.08
GND1
  Top 1.676: U$5.SLEEVE TR3.3 | TR4.4 U$4.SLEEVE
  pour Bottom (isolate 0.406): 81.28,35.56 146.69,35.56 146.69,5.08 81.28,5.08
  pour Top (isolate 0.406): 81.28,35.56 146.69,35.56 146.69,5.08 81.28,5.08
GND2
  Top 1.676: U$8.SLEEVE TR5.3 | TR6.4 U$7.SLEEVE
  pour Bottom (isolate 0.406): 152.4,35.56 217.81,35.56 217.81,5.08 152.4,5.08
  pour Top (isolate 0.406): 152.4,35.56 217.81,35.56 217.81,5.08 152.4,5.08
GND3
  Top 1.676: U$11.SLEEVE TR7.3 | TR8.4 U$10.SLEEVE
  pour Bottom (isolate 0.406): 223.52,35.56 288.93,35.56 288.93,5.08 223.52,5.08
  pour Top (isolate 0.406): 223.52,35.56 288.93,35.56 288.93,5.08 223.52,5.08
GND4
  Top 1.676: U$14.SLEEVE TR9.3 | TR10.4 U$13.SLEEVE
  pour Bottom (isolate 0.406): 294.64,35.56 360.05,35.56 360.05,5.08 294.64,5.08
  pour Top (isolate 0.406): 294.64,35.56 360.05,35.56 360.05,5.08 294.64,5.08
GND5
  Top 1.676: U$17.SLEEVE TR11.3 | TR12.4 U$16.SLEEVE
  pour Bottom (isolate 0.406): 10.16,71.12 75.56,71.12 75.56,40.64 10.16,40.64
  pour Top (isolate 0.406): 10.16,71.12 75.56,71.12 75.56,40.64 10.16,40.64
GND6
  Top 1.676: U$20.SLEEVE TR13.3 | TR14.4 U$19.SLEEVE
  pour Bottom (isolate 0.406): 81.28,71.12 146.69,71.12 146.69,40.64 81.28,40.64
  pour Top (isolate 0.406): 81.28,71.12 146.69,71.12 146.69,40.64 81.28,40.64
GND7
  Top 1.676: U$23.SLEEVE TR15.3 | U$22.SLEEVE TR16.4
  pour Bottom (isolate 0.406): 152.4,71.12 217.81,71.12 217.81,40.64 152.4,40.64
  pour Top (isolate 0.406): 152.4,71.12 217.81,71.12 217.81,40.64 152.4,40.64
GND8
  Top 1.676: U$26.SLEEVE TR17.3 | TR18.4 U$25.SLEEVE
  pour Bottom (isolate 0.406): 223.52,71.12 288.93,71.12 288.93,40.64 223.52,40.64
  pour Top (isolate 0.406): 223.52,71.12 288.93,71.12 288.93,40.64 223.52,40.64
GND9
  Top 1.676: U$29.SLEEVE TR19.3 | TR20.4 U$28.SLEEVE
  pour Bottom (isolate 0.406): 294.64,71.12 360.05,71.12 360.05,40.64 294.64,40.64
  pour Top (isolate 0.406): 294.64,71.12 360.05,71.12 360.05,40.64 294.64,40.64
GND10
  Top 1.676: U$32.SLEEVE TR21.3 | TR22.4 U$31.SLEEVE
  pour Bottom (isolate 0.406): 10.16,106.68 75.56,106.68 75.56,76.2 10.16,76.2
  pour Top (isolate 0.406): 10.16,106.68 75.56,106.68 75.56,76.2 10.16,76.2
GND11
  Top 1.676: U$35.SLEEVE TR23.3 | TR24.4 U$34.SLEEVE
  pour Bottom (isolate 0.406): 81.28,106.68 146.69,106.68 146.69,76.2 81.28,76.2
  pour Top (isolate 0.406): 81.28,106.68 146.69,106.68 146.69,76.2 81.28,76.2
GND12
  Top 1.676: U$38.SLEEVE TR25.3 | TR26.4 U$37.SLEEVE
  pour Bottom (isolate 0.406): 152.4,106.68 217.81,106.68 217.81,76.2 152.4,76.2
  pour Top (isolate 0.406): 152.4,106.68 217.81,106.68 217.81,76.2 152.4,76.2
GND13
  Top 1.676: U$41.SLEEVE TR27.3 | TR28.4 U$40.SLEEVE
  pour Bottom (isolate 0.406): 223.52,106.68 288.93,106.68 288.93,76.2 223.52,76.2
  pour Top (isolate 0.406): 223.52,106.68 288.93,106.68 288.93,76.2 223.52,76.2
GND14
  Top 1.676: U$44.SLEEVE TR29.3 | TR30.4 U$43.SLEEVE
  pour Bottom (isolate 0.406): 294.64,106.68 360.05,106.68 360.05,76.2 294.64,76.2
  pour Top (isolate 0.406): 294.64,106.68 360.05,106.68 360.05,76.2 294.64,76.2
GND15
  Top 1.676: U$47.SLEEVE TR31.3 | TR32.4 U$46.SLEEVE
  pour Bottom (isolate 0.406): 10.16,142.24 75.56,142.24 75.56,111.76 10.16,111.76
  pour Top (isolate 0.406): 10.16,142.24 75.56,142.24 75.56,111.76 10.16,111.76
GND16
  Top 1.676: U$50.SLEEVE TR33.3 | U$49.SLEEVE TR34.4
  pour Bottom (isolate 0.406): 81.28,142.24 146.69,142.24 146.69,111.76 81.28,111.76
  pour Top (isolate 0.406): 81.28,142.24 146.69,142.24 146.69,111.76 81.28,111.76
GND17
  Top 1.676: U$53.SLEEVE TR35.3 | TR36.4 U$52.SLEEVE
  pour Bottom (isolate 0.406): 152.4,142.24 217.81,142.24 217.81,111.76 152.4,111.76
  pour Top (isolate 0.406): 152.4,142.24 217.81,142.24 217.81,111.76 152.4,111.76
GND18
  Top 1.676: U$56.SLEEVE TR37.3 | TR38.4 U$55.SLEEVE
  pour Bottom (isolate 0.406): 223.52,142.24 288.93,142.24 288.93,111.76 223.52,111.76
  pour Top (isolate 0.406): 223.52,142.24 288.93,142.24 288.93,111.76 223.52,111.76
GND19
  Top 1.676: U$59.SLEEVE TR39.3 | TR40.4 U$58.SLEEVE
  pour Bottom (isolate 0.406): 294.64,142.24 360.05,142.24 360.05,111.76 294.64,111.76
  pour Top (isolate 0.406): 294.64,142.24 360.05,142.24 360.05,111.76 294.64,111.76
GND20
  Top 1.676: U$62.SLEEVE TR41.3 | TR42.4 U$61.SLEEVE
  pour Bottom (isolate 0.406): 10.16,177.8 75.56,177.8 75.56,147.32 10.16,147.32
  pour Top (isolate 0.406): 10.16,177.8 75.56,177.8 75.56,147.32 10.16,147.32
GND21
  Top 1.676: U$65.SLEEVE TR43.3 | TR44.4 U$64.SLEEVE
  pour Bottom (isolate 0.406): 81.28,177.8 146.69,177.8 146.69,147.32 81.28,147.32
  pour Top (isolate 0.406): 81.28,177.8 146.69,177.8 146.69,147.32 81.28,147.32
GND22
  Top 1.676: U$68.SLEEVE TR45.3 | TR46.4 U$67.SLEEVE
  pour Bottom (isolate 0.406): 152.4,177.8 217.81,177.8 217.81,147.32 152.4,147.32
  pour Top (isolate 0.406): 152.4,177.8 217.81,177.8 217.81,147.32 152.4,147.32
GND23
  Top 1.676: U$71.SLEEVE TR47.3 | TR48.4 U$70.SLEEVE
  pour Bottom (isolate 0.406): 223.52,177.8 288.93,177.8 288.93,147.32 223.52,147.32
  pour Top (isolate 0.406): 223.52,177.8 288.93,177.8 288.93,147.32 223.52,147.32
GND24
  Top 1.676: U$74.SLEEVE TR49.3 | TR50.4 U$73.SLEEVE
  pour Bottom (isolate 0.406): 294.64,177.8 360.05,177.8 360.05,147.32 294.64,147.32
  pour Top (isolate 0.406): 294.64,177.8 360.05,177.8 360.05,147.32 294.64,147.32
GND25
  Top 1.676: U$77.SLEEVE TR51.3 | U$76.SLEEVE TR52.4
  pour Bottom (isolate 0.406): 10.16,213.36 75.56,213.36 75.56,182.88 10.16,182.88
  pour Top (isolate 0.406): 10.16,213.36 75.56,213.36 75.56,182.88 10.16,182.88
GND26
  Top 1.676: U$80.SLEEVE TR53.3 | TR54.4 U$79.SLEEVE
  pour Bottom (isolate 0.406): 81.28,213.36 146.69,213.36 146.69,182.88 81.28,182.88
  pour Top (isolate 0.406): 81.28,213.36 146.69,213.36 146.69,182.88 81.28,182.88
GND27
  Top 1.676: U$83.SLEEVE TR55.3 | TR56.4 U$82.SLEEVE
  pour Bottom (isolate 0.406): 152.4,213.36 217.81,213.36 217.81,182.88 152.4,182.88
  pour Top (isolate 0.406): 152.4,213.36 217.81,213.36 217.81,182.88 152.4,182.88
GND28
  Top 1.676: U$86.SLEEVE TR57.3 | TR58.4 U$85.SLEEVE
  pour Bottom (isolate 0.406): 223.52,213.36 288.93,213.36 288.93,182.88 223.52,182.88
  pour Top (isolate 0.406): 223.52,213.36 288.93,213.36 288.93,182.88 223.52,182.88
GND29
  Top 1.676: U$89.SLEEVE TR59.3 | TR60.4 U$88.SLEEVE
  pour Bottom (isolate 0.406): 294.64,213.36 360.05,213.36 360.05,182.88 294.64,182.88
  pour Top (isolate 0.406): 294.64,213.36 360.05,213.36 360.05,182.88 294.64,182.88
GND30
  Top 1.676: U$92.SLEEVE TR61.3 | TR62.4 U$91.SLEEVE
  pour Bottom (isolate 0.406): 10.16,248.92 75.56,248.92 75.56,218.44 10.16,218.44
  pour Top (isolate 0.406): 10.16,248.92 75.56,248.92 75.56,218.44 10.16,218.44
GND31
  Top 1.676: U$95.SLEEVE TR63.3 | TR64.4 U$94.SLEEVE
  pour Bottom (isolate 0.406): 81.28,248.92 146.69,248.92 146.69,218.44 81.28,218.44
  pour Top (isolate 0.406): 81.28,248.92 146.69,248.92 146.69,218.44 81.28,218.44
GND32
  Top 1.676: U$98.SLEEVE TR65.3 | TR66.4 U$97.SLEEVE
  pour Bottom (isolate 0.406): 152.4,248.92 217.81,248.92 217.81,218.44 152.4,218.44
  pour Top (isolate 0.406): 152.4,248.92 217.81,248.92 217.81,218.44 152.4,218.44
GND33
  Top 1.676: U$101.SLEEVE TR67.3 | TR68.4 U$100.SLEEVE
  pour Bottom (isolate 0.406): 223.52,248.92 288.93,248.92 288.93,218.44 223.52,218.44
  pour Top (isolate 0.406): 223.52,248.92 288.93,248.92 288.93,218.44 223.52,218.44
GND34
  Top 1.676: U$104.SLEEVE TR69.3 | TR70.4 U$103.SLEEVE
  pour Bottom (isolate 0.406): 294.64,248.92 360.05,248.92 360.05,218.44 294.64,218.44
  pour Top (isolate 0.406): 294.64,248.92 360.05,248.92 360.05,218.44 294.64,218.44
N$1
  Top 1.676: TR1.6 D1.C D2.A
N$2
  Top 1.676: TR2.1 D2.C D4.A
N$3
  Top 1.676: TR1.4 D3.A D4.C
N$4
  Top 1.676: D1.A D3.C TR2.3
N$5
  Top 1.676: U$2.TIP TR1.1
N$6
  Top 1.676: TR3.6 D5.C D6.A
N$7
  Top 1.676: TR2.6 U$1.TIP
N$8
  Top 1.676: TR4.1 D6.C D8.A
N$9
  Bottom 1.422: U$3.TIP TR1.5
N$10
  Top 1.676: TR3.4 D7.A D8.C
N$11
  Top 1.676: D5.A D7.C TR4.3
N$12
  Top 1.676: U$5.TIP TR3.1
N$13
  Top 1.676: TR4.6 U$4.TIP
N$14
  Bottom 1.422: U$6.TIP TR3.5
N$15
  Top 1.676: TR5.6 D9.C D10.A
N$16
  Top 1.676: TR6.1 D10.C D12.A
N$17
  Top 1.676: TR5.4 D11.A D12.C
N$18
  Top 1.676: D9.A D11.C TR6.3
N$19
  Top 1.676: U$8.TIP TR5.1
N$20
  Top 1.676: TR6.6 U$7.TIP
N$21
  Bottom 1.422: U$9.TIP TR5.5
N$22
  Top 1.676: TR7.6 D13.C D14.A
N$23
  Top 1.676: TR8.1 D14.C D16.A
N$24
  Top 1.676: TR7.4 D15.A D16.C
N$25
  Top 1.676: D13.A D15.C TR8.3
N$26
  Top 1.676: U$11.TIP TR7.1
N$27
  Top 1.676: TR8.6 U$10.TIP
N$28
  Bottom 1.422: TR7.5 U$12.TIP
N$29
  Top 1.676: TR9.6 D17.C D18.A
N$30
  Top 1.676: TR10.1 D18.C D20.A
N$31
  Top 1.676: TR9.4 D19.A D20.C
N$32
  Top 1.676: D17.A D19.C TR10.3
N$33
  Top 1.676: U$14.TIP TR9.1
N$34
  Top 1.676: TR10.6 U$13.TIP
N$35
  Bottom 1.422: U$15.TIP TR9.5
N$36
  Top 1.676: TR11.6 D21.C D22.A
N$37
  Top 1.676: TR12.1 D22.C D24.A
N$38
  Top 1.676: TR11.4 D23.A D24.C
N$39
  Top 1.676: D21.A D23.C TR12.3
N$40
  Top 1.676: U$17.TIP TR11.1
N$41
  Top 1.676: TR12.6 U$16.TIP
N$42
  Bottom 1.422: U$18.TIP TR11.5
N$43
  Top 1.676: TR13.6 D25.C D26.A
N$44
  Top 1.676: TR14.1 D26.C D28.A
N$45
  Top 1.676: TR13.4 D27.A D28.C
N$46
  Top 1.676: D25.A D27.C TR14.3
N$47
  Top 1.676: U$20.TIP TR13.1
N$48
  Top 1.676: TR14.6 U$19.TIP
N$49
  Bottom 1.422: U$21.TIP TR13.5
N$50
  Top 1.676: TR15.6 D29.C D30.A
N$51
  Top 1.676: TR16.1 D30.C D32.A
N$52
  Top 1.676: TR15.4 D31.A D32.C
N$53
  Top 1.676: D29.A D31.C TR16.3
N$54
  Top 1.676: U$23.TIP TR15.1
N$55
  Top 1.676: TR16.6 U$22.TIP
N$56
  Bottom 1.422: U$24.TIP TR15.5
N$57
  Top 1.676: TR17.6 D33.C D34.A
N$58
  Top 1.676: TR18.1 D34.C D36.A
N$59
  Top 1.676: TR17.4 D35.A D36.C
N$60
  Top 1.676: D33.A D35.C TR18.3
N$61
  Top 1.676: U$26.TIP TR17.1
N$62
  Top 1.676: TR18.6 U$25.TIP
N$63
  Bottom 1.422: U$27.TIP TR17.5
N$64
  Top 1.676: TR19.6 D37.C D38.A
N$65
  Top 1.676: TR20.1 D38.C D40.A
N$66
  Top 1.676: TR19.4 D39.A D40.C
N$67
  Top 1.676: D37.A D39.C TR20.3
N$68
  Top 1.676: U$29.TIP TR19.1
N$69
  Top 1.676: TR20.6 U$28.TIP
N$70
  Bottom 1.422: U$30.TIP TR19.5
N$71
  Top 1.676: TR21.6 D41.C D42.A
N$72
  Top 1.676: TR22.1 D42.C D44.A
N$73
  Top 1.676: TR21.4 D43.A D44.C
N$74
  Top 1.676: D41.A D43.C TR22.3
N$75
  Top 1.676: U$32.TIP TR21.1
N$76
  Top 1.676: TR22.6 U$31.TIP
N$77
  Bottom 1.422: U$33.TIP TR21.5
N$78
  Top 1.676: TR23.6 D45.C D46.A
N$79
  Top 1.676: TR24.1 D46.C D48.A
N$80
  Top 1.676: TR23.4 D47.A D48.C
N$81
  Top 1.676: D45.A D47.C TR24.3
N$82
  Top 1.676: U$35.TIP TR23.1
N$83
  Top 1.676: TR24.6 U$34.TIP
N$84
  Bottom 1.422: U$36.TIP TR23.5
N$85
  Top 1.676: TR25.6 D49.C D50.A
N$86
  Top 1.676: TR26.1 D50.C D52.A
N$87
  Top 1.676: TR25.4 D51.A D52.C
N$88
  Top 1.676: D49.A D51.C TR26.3
N$89
  Top 1.676: U$38.TIP TR25.1
N$90
  Top 1.676: TR26.6 U$37.TIP
N$91
  Bottom 1.422: TR25.5 U$39.TIP
N$92
  Top 1.676: TR27.6 D53.C D54.A
N$93
  Top 1.676: TR28.1 D54.C D56.A
N$94
  Top 1.676: TR27.4 D55.A D56.C
N$95
  Top 1.676: D53.A D55.C TR28.3
N$96
  Top 1.676: U$41.TIP TR27.1
N$97
  Top 1.676: TR28.6 U$40.TIP
N$98
  Bottom 1.422: U$42.TIP TR27.5
N$99
  Top 1.676: TR29.6 D57.C D58.A
N$100
  Top 1.676: TR30.1 D58.C D60.A
N$101
  Top 1.676: TR29.4 D59.A D60.C
N$102
  Top 1.676: D57.A D59.C TR30.3
N$103
  Top 1.676: U$44.TIP TR29.1
N$104
  Top 1.676: TR30.6 U$43.TIP
N$105
  Bottom 1.422: U$45.TIP TR29.5
N$106
  Top 1.676: TR31.6 D61.C D62.A
N$107
  Top 1.676: TR32.1 D62.C D64.A
N$108
  Top 1.676: TR31.4 D63.A D64.C
N$109
  Top 1.676: D61.A D63.C TR32.3
N$110
  Top 1.676: U$47.TIP TR31.1
N$111
  Top 1.676: TR32.6 U$46.TIP
N$112
  Bottom 1.422: U$48.TIP TR31.5
N$113
  Top 1.676: TR33.6 D65.C D66.A
N$114
  Top 1.676: TR34.1 D66.C D68.A
N$115
  Top 1.676: TR33.4 D67.A D68.C
N$116
  Top 1.676: D65.A D67.C TR34.3
N$117
  Top 1.676: U$50.TIP TR33.1
N$118
  Top 1.676: TR34.6 U$49.TIP
N$119
  Bottom 1.422: U$51.TIP TR33.5
N$120
  Top 1.676: TR35.6 D69.C D70.A
N$121
  Top 1.676: TR36.1 D70.C D72.A
N$122
  Top 1.676: TR35.4 D71.A D72.C
N$123
  Top 1.676: D69.A D71.C TR36.3
N$124
  Top 1.676: U$53.TIP TR35.1
N$125
  Top 1.676: TR36.6 U$52.TIP
N$126
  Bottom 1.422: U$54.TIP TR35.5
N$127
  Top 1.676: TR37.6 D73.C D74.A
N$128
  Top 1.676: TR38.1 D74.C D76.A
N$129
  Top 1.676: TR37.4 D75.A D76.C
N$130
  Top 1.676: D73.A D75.C TR38.3
N$131
  Top 1.676: U$56.TIP TR37.1
N$132
  Top 1.676: TR38.6 U$55.TIP
N$133
  Bottom 1.422: U$57.TIP TR37.5
N$134
  Top 1.676: TR39.6 D77.C D78.A
N$135
  Top 1.676: TR40.1 D78.C D80.A
N$136
  Top 1.676: TR39.4 D79.A D80.C
N$137
  Top 1.676: D77.A D79.C TR40.3
N$138
  Top 1.676: U$59.TIP TR39.1
N$139
  Top 1.676: TR40.6 U$58.TIP
N$140
  Bottom 1.422: U$60.TIP TR39.5
N$141
  Top 1.676: TR41.6 D81.C D82.A
N$142
  Top 1.676: TR42.1 D82.C D84.A
N$143
  Top 1.676: TR41.4 D83.A D84.C
N$144
  Top 1.676: D81.A D83.C TR42.3
N$145
  Top 1.676: U$62.TIP TR41.1
N$146
  Top 1.676: TR42.6 U$61.TIP
N$147
  Bottom 1.422: U$63.TIP TR41.5
N$148
  Top 1.676: TR43.6 D85.C D86.A
N$149
  Top 1.676: TR44.1 D86.C D88.A
N$150
  Top 1.676: TR43.4 D87.A D88.C
N$151
  Top 1.676: D85.A D87.C TR44.3
N$152
  Top 1.676: U$65.TIP TR43.1
N$153
  Top 1.676: TR44.6 U$64.TIP
N$154
  Bottom 1.422: TR43.5 U$66.TIP
N$155
  Top 1.676: TR45.6 D89.C D90.A
N$156
  Top 1.676: TR46.1 D90.C D92.A
N$157
  Top 1.676: TR45.4 D91.A D92.C
N$158
  Top 1.676: D89.A D91.C TR46.3
N$159
  Top 1.676: U$68.TIP TR45.1
N$160
  Top 1.676: TR46.6 U$67.TIP
N$161
  Bottom 1.422: U$69.TIP TR45.5
N$162
  Top 1.676: TR47.6 D93.C D94.A
N$163
  Top 1.676: TR48.1 D94.C D96.A
N$164
  Top 1.676: TR47.4 D95.A D96.C
N$165
  Top 1.676: D93.A D95.C TR48.3
N$166
  Top 1.676: U$71.TIP TR47.1
N$167
  Top 1.676: TR48.6 U$70.TIP
N$168
  Bottom 1.422: U$72.TIP TR47.5
N$169
  Top 1.676: TR49.6 D97.C D98.A
N$170
  Top 1.676: TR50.1 D98.C D100.A
N$171
  Top 1.676: TR49.4 D99.A D100.C
N$172
  Top 1.676: D97.A D99.C TR50.3
N$173
  Top 1.676: U$74.TIP TR49.1
N$174
  Top 1.676: TR50.6 U$73.TIP
N$175
  Bottom 1.422: U$75.TIP TR49.5
N$176
  Top 1.676: TR51.6 D101.C D102.A
N$177
  Top 1.676: TR52.1 D102.C D104.A
N$178
  Top 1.676: TR51.4 D103.A D104.C
N$179
  Top 1.676: D101.A D103.C TR52.3
N$180
  Top 1.676: U$77.TIP TR51.1
N$181
  Top 1.676: TR52.6 U$76.TIP
N$182
  Bottom 1.422: U$78.TIP TR51.5
N$183
  Top 1.676: TR53.6 D105.C D106.A
N$184
  Top 1.676: TR54.1 D106.C D108.A
N$185
  Top 1.676: TR53.4 D107.A D108.C
N$186
  Top 1.676: D105.A D107.C TR54.3
N$187
  Top 1.676: U$80.TIP TR53.1
N$188
  Top 1.676: TR54.6 U$79.TIP
N$189
  Bottom 1.422: U$81.TIP TR53.5
N$190
  Top 1.676: TR55.6 D109.C D110.A
N$191
  Top 1.676: TR56.1 D110.C D112.A
N$192
  Top 1.676: TR55.4 D111.A D112.C
N$193
  Top 1.676: D109.A D111.C TR56.3
N$194
  Top 1.676: U$83.TIP TR55.1
N$195
  Top 1.676: TR56.6 U$82.TIP
N$196
  Bottom 1.422: U$84.TIP TR55.5
N$197
  Top 1.676: TR57.6 D113.C D114.A
N$198
  Top 1.676: TR58.1 D114.C D116.A
N$199
  Top 1.676: TR57.4 D115.A D116.C
N$200
  Top 1.676: D113.A D115.C TR58.3
N$201
  Top 1.676: U$86.TIP TR57.1
N$202
  Top 1.676: TR58.6 U$85.TIP
N$203
  Bottom 1.422: U$87.TIP TR57.5
N$204
  Top 1.676: TR59.6 D117.C D118.A
N$205
  Top 1.676: TR60.1 D118.C D120.A
N$206
  Top 1.676: TR59.4 D119.A D120.C
N$207
  Top 1.676: D117.A D119.C TR60.3
N$208
  Top 1.676: U$89.TIP TR59.1
N$209
  Top 1.676: TR60.6 U$88.TIP
N$210
  Bottom 1.422: U$90.TIP TR59.5
N$211
  Top 1.676: TR61.6 D121.C D122.A
N$212
  Top 1.676: TR62.1 D122.C D124.A
N$213
  Top 1.676: TR61.4 D123.A D124.C
N$214
  Top 1.676: D121.A D123.C TR62.3
N$215
  Top 1.676: U$92.TIP TR61.1
N$216
  Top 1.676: TR62.6 U$91.TIP
N$217
  Bottom 1.422: TR61.5 U$93.TIP
N$218
  Top 1.676: TR63.6 D125.C D126.A
N$219
  Top 1.676: TR64.1 D126.C D128.A
N$220
  Top 1.676: TR63.4 D127.A D128.C
N$221
  Top 1.676: D125.A D127.C TR64.3
N$222
  Top 1.676: U$95.TIP TR63.1
N$223
  Top 1.676: TR64.6 U$94.TIP
N$224
  Bottom 1.422: U$96.TIP TR63.5
N$225
  Top 1.676: TR65.6 D129.C D130.A
N$226
  Top 1.676: TR66.1 D130.C D132.A
N$227
  Top 1.676: TR65.4 D131.A D132.C
N$228
  Top 1.676: D129.A D131.C TR66.3
N$229
  Top 1.676: U$98.TIP TR65.1
N$230
  Top 1.676: TR66.6 U$97.TIP
N$231
  Bottom 1.422: U$99.TIP TR65.5
N$232
  Top 1.676: TR67.6 D133.C D134.A
N$233
  Top 1.676: TR68.1 D134.C D136.A
N$234
  Top 1.676: TR67.4 D135.A D136.C
N$235
  Top 1.676: D133.A D135.C TR68.3
N$236
  Top 1.676: U$101.TIP TR67.1
N$237
  Top 1.676: TR68.6 U$100.TIP
N$238
  Bottom 1.422: U$102.TIP TR67.5
N$239
  Top 1.676: TR69.6 D137.C D138.A
N$240
  Top 1.676: TR70.1 D138.C D140.A
N$241
  Top 1.676: TR69.4 D139.A D140.C
N$242
  Top 1.676: D137.A D139.C TR70.3
N$243
  Top 1.676: U$104.TIP TR69.1
N$244
  Top 1.676: TR70.6 U$103.TIP
N$245
  Bottom 1.422: U$105.TIP TR69.5

## Text on the board
tPlace: D2 | D2 | D2 | D2 | D2 | In | Out | In | Out | In | Out | In | Out | In | Out | D1 | D1 | D1 | D1 | D1 | TR1 | TR2 | TR1 | TR2 | TR1 | TR2 | TR1 | TR2 | TR1 | TR2 | D3 | D4 | D3 | D4 | D3 | D4 | D3 | D4 | D3 | D4 | X | X | X | X | X | Carrier | Carrier | Carrier | Carrier | Carrier | Synthrotek | Synthrotek | Synthrotek | Synthrotek | Synthrotek | Y | Y | Y | Y | Y | Passive Ring Mod | Passive Ring Mod | Passive Ring Mod | Passive Ring Mod | Passive Ring Mod | In | D2 | Out | In | D2 | Out | In | D2 | Out | In | D2 | Out | In | D2 | Out | D1 | D1 | D1 | D1 | D1 | TR1 | TR2 | TR1 | TR2 | TR1 | TR2 | TR1 | TR2 | TR1 | TR2 | D4 | D4 | D4 | D4 | D4 | D3 | D3 | D3 | D3 | D3 | X | X | X | X | X | Carrier | Carrier | Carrier | Carrier | Carrier | Synthrotek | Synthrotek | Synthrotek | Synthrotek | Synthrotek | Y | Passive Ring Mod | Y | Passive Ring Mod | Y | Passive Ring Mod | Y | Passive Ring Mod | Y | Passive Ring Mod | D2 | D2 | D2 | D2 | D2 | In | Out | In | Out | In | Out | In | Out | In | Out | D1 | D1 | D1 | D1 | D1 | TR1 | TR2 | TR1 | TR2 | TR1 | TR2 | TR1 | TR2 | TR1 | TR2 | D3 | D4 | D3 | D4 | D3 | D4 | D3 | D4 | D3 | D4 | X | X | X | X | X | Carrier | Carrier | Carrier | Carrier | Carrier | Synthrotek | Synthrotek | Synthrotek | Synthrotek | Synthrotek | Y | Y | Y | Y | Y | Passive Ring Mod | Passive Ring Mod | Passive Ring Mod | Passive Ring Mod | Passive Ring Mod | D2 | D2 | D2 | D2 | D2 | In | Out | In | Out | In | Out | In | Out | In | Out | D1 | D1 | D1 | D1 | D1 | TR1 | TR2 | TR1 | TR2 | TR1 | TR2 | TR1 | TR2 | TR1 | TR2 | D3 | D4 | D3 | D4 | D3 | D4 | D3 | D4 | D3 | D4 | X | X | X | X | X | Carrier | Carrier | Carrier | Carrier | Carrier | Synthrotek | Synthrotek | Synthrotek | Synthrotek | Synthrotek | Y | Y | Y | Y | Y | Passive Ring Mod | Passive Ring Mod | Passive Ring Mod | Passive Ring Mod | Passive Ring Mod | D2 | D2 | D2 | D2 | D2 | In | Out | In | Out | In | Out | In | Out | In | Out | D1 | D1 | D1 | D1 | D1 | TR1 | TR2 | TR1 | TR2 | TR1 | TR2 | TR1 | TR2 | TR1 | TR2 | D3 | D4 | D3 | D4 | D3 | D4 | D3 | D4 | D3 | D4 | X | X | X | X | X | Carrier | Carrier | Carrier | Carrier | Carrier | Y | Synthrotek | Y | Synthrotek | Y | Synthrotek | Y | Synthrotek | Y | Synthrotek | Passive Ring Mod | Passive Ring Mod | Passive Ring Mod | Passive Ring Mod | Passive Ring Mod | D2 | D2 | D2 | D2 | D2 | In | Out | In | Out | In | Out | In | Out | In | Out | D1 | D1 | D1 | D1 | D1 | TR1 | TR2 | TR1 | TR2 | TR1 | TR2 | TR1 | TR2 | TR1 | TR2 | D3 | D4 | D3 | D4 | D3 | D4 | D3 | D4 | D3 | D4 | X | X | X | X | X | Carrier | Carrier | Carrier | Carrier | Carrier | Synthrotek | Synthrotek | Synthrotek | Synthrotek | Synthrotek | Y | Y | Y | Y | Y | Passive Ring Mod | Passive Ring Mod | Passive Ring Mod | Passive Ring Mod | Passive Ring Mod | In | D2 | Out | In | D2 | Out | In | D2 | Out | In | D2 | Out | In | D2 | Out | D1 | D1 | D1 | D1 | D1 | TR1 | TR2 | TR1 | TR2 | TR1 | TR2 | TR1 | TR2 | TR1 | TR2 | D4 | D4 | D4 | D4 | D4 | D3 | D3 | D3 | D3 | D3 | X | X | X | X | X | Carrier | Carrier | Carrier | Carrier | Carrier | Synthrotek | Synthrotek | Synthrotek | Synthrotek | Synthrotek | Y | Passive Ring Mod | Y | Passive Ring Mod | Y | Passive Ring Mod | Y | Passive Ring Mod | Y | Passive Ring Mod